# Altium PCB pcb.PcbDoc
Units mil, origin at the board's own origin, x right, y up, seen from the top; angles counter-clockwise.
Board outline 2140 x 3285 mil, 2 copper layers (Top Layer, Bottom Layer); 24 components, 73 nets, 179 pads, 210 vias.
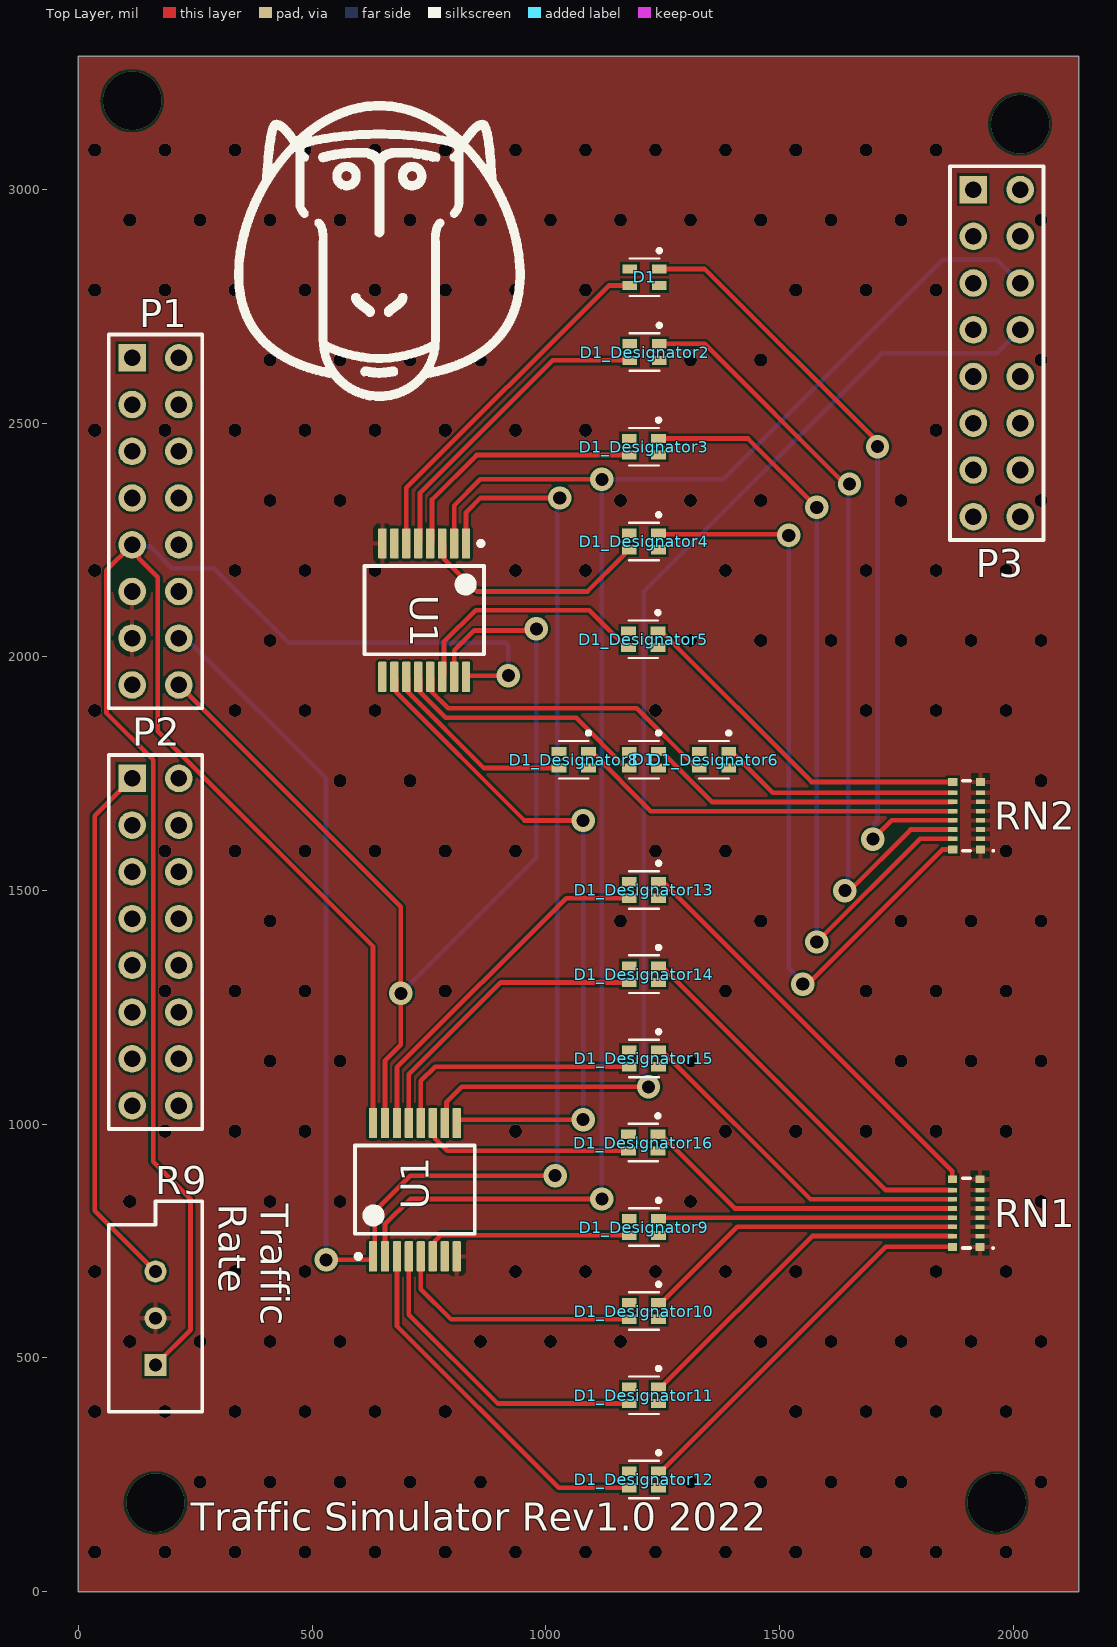
[diagram p0: Top Layer view]
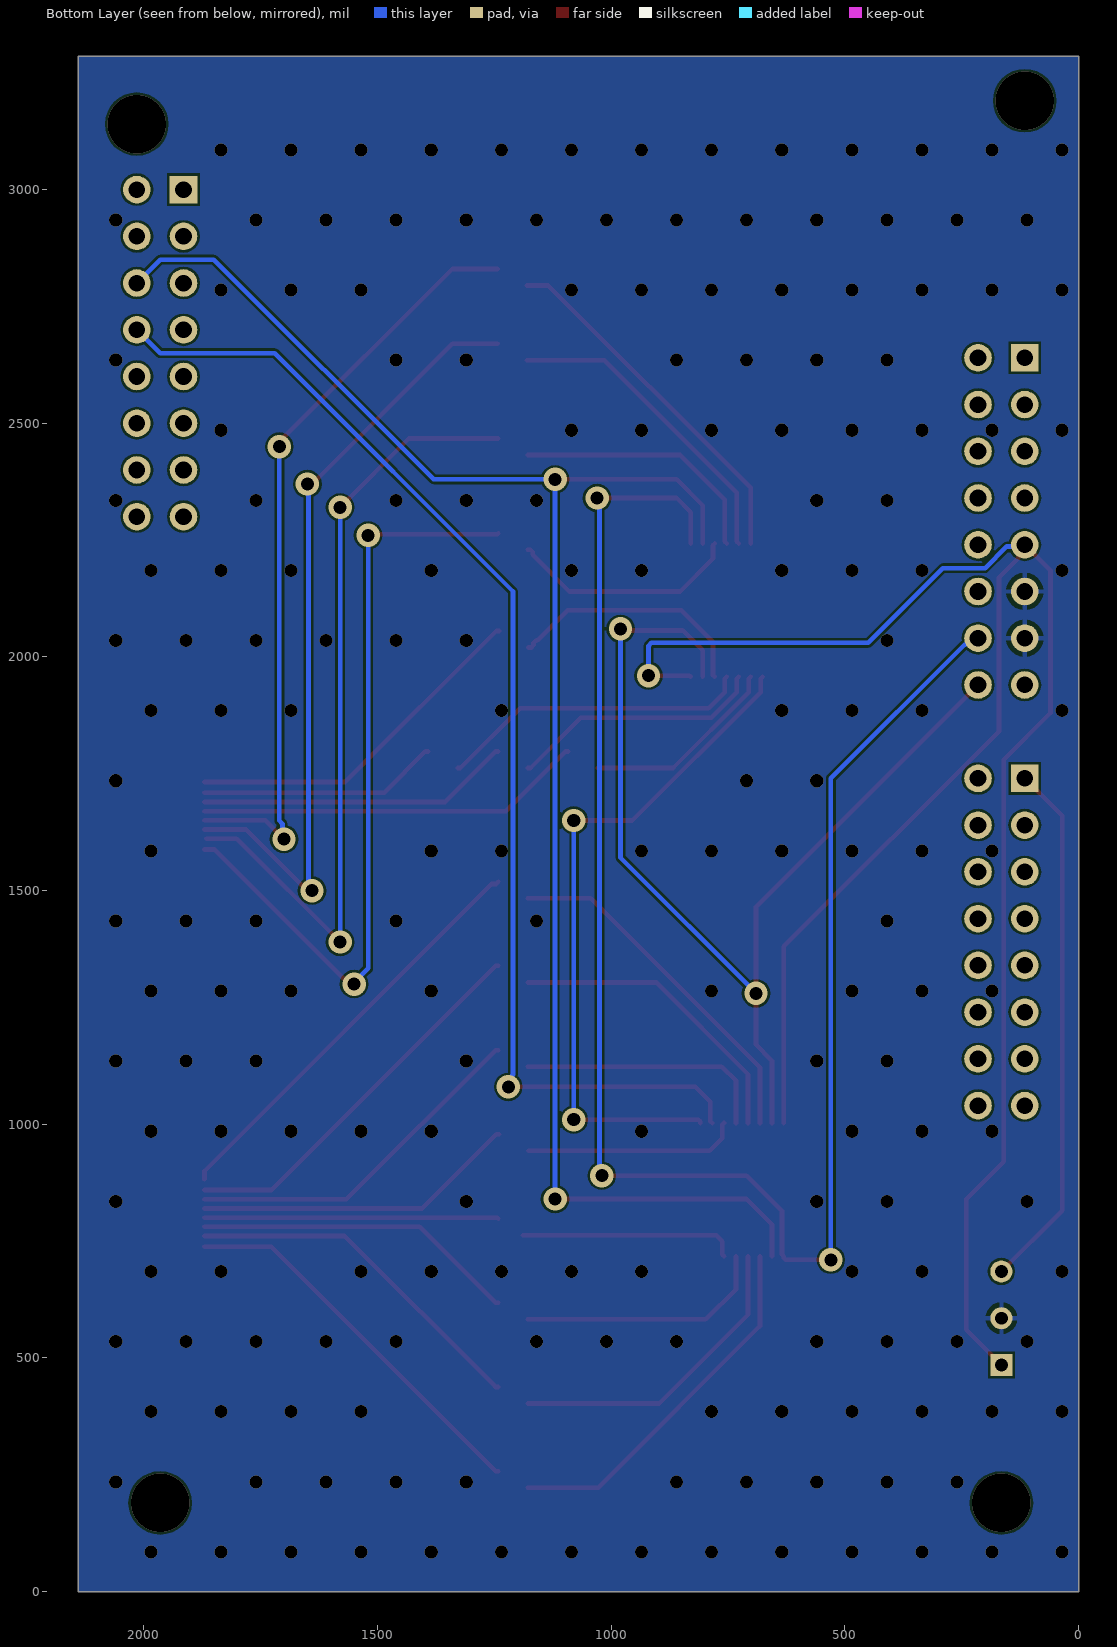
[diagram p1: Bottom Layer view, seen from below]
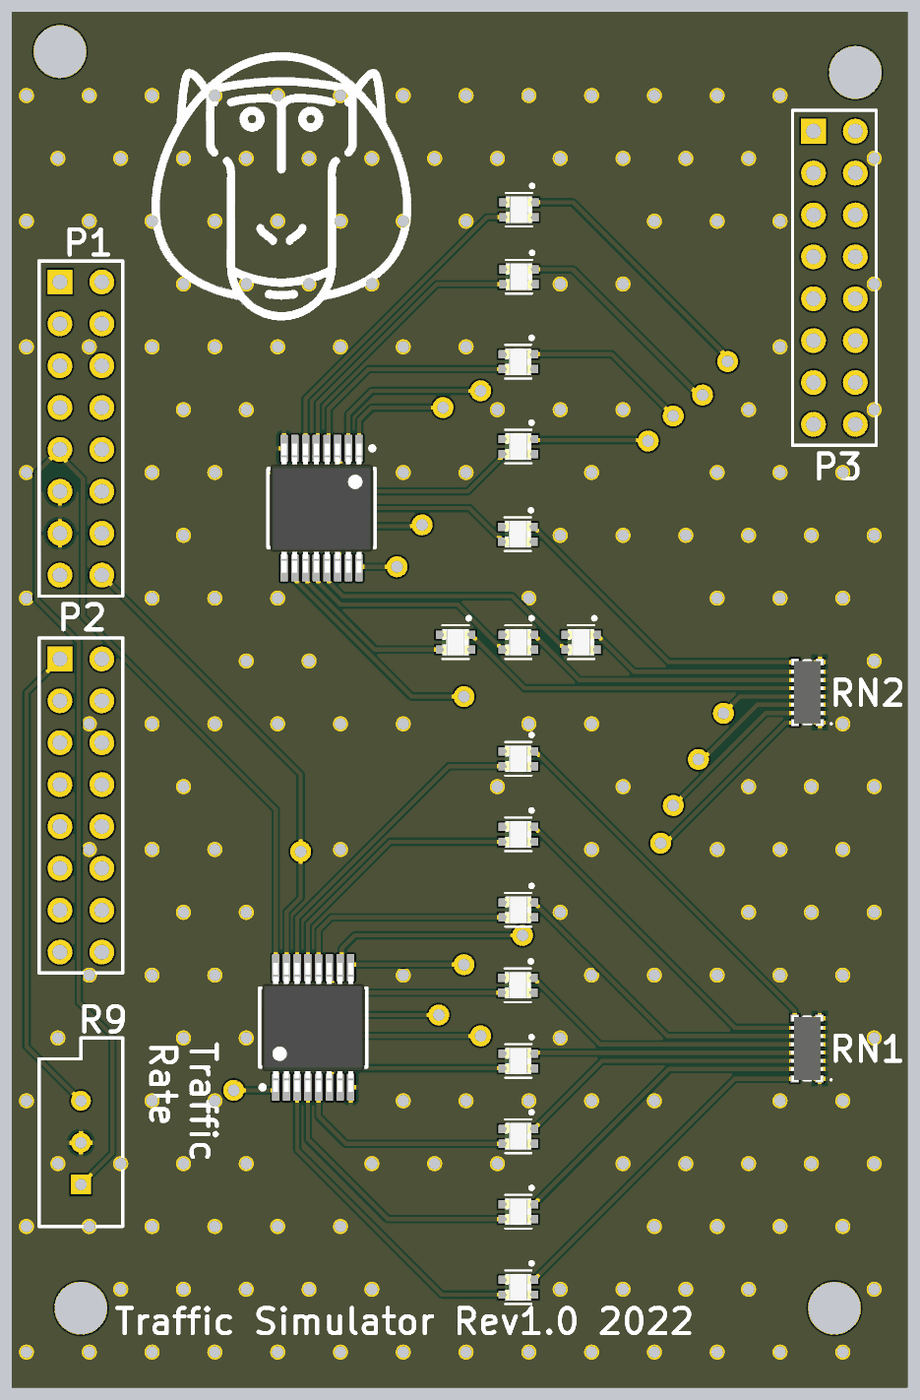
[diagram p2: 3D render of the assembled board from above, using the file's embedded part models]

## Layer stack, top to bottom
Top Solder: solder mask 0.4, Solder Resist, Dk 3.5
Top Layer: signal copper 1.4
Dielectric 1: dielectric 12.6, FR-4, Dk 4.8
Bottom Layer: signal copper 1.4
Bottom Solder: solder mask 0.4, Solder Resist, Dk 3.5

## Board outline
0,0 2140,0 2140,3285 0,3285

## Design rules (kind name [scope] priority, off if disabled: settings)
Clearance [All] p1: gap=5 ignorepadtopadclearanceinfootprint=TRUE except(0: Arc-Hole Track-Hole SMDPad-Hole THPad-Hole Via-Hole Fill-Hole Poly-Hole Region-Hole Text-Hole)
PolygonConnect [All] p1: connectstyle=Relief reliefconductorwidth=10 reliefentries=4 polygonreliefangle="90 Angle" airgapwidth=10
RoutingVias [All] p1: holewidth=28 width=50 viastyle="Through Hole" minholewidth=28 minwidth=50 maxholewidth=28 maxwidth=50
ShortCircuit [All] p1: allowed=TRUE
SolderMaskExpansion [All] p1: expansion=4 istentingtop=FALSE
UnRoutedNet [All] p1: checkbadconnections=TRUE
Width [All] p1: maxlimit=10 minlimit=5 preferedwidth=10
28 further rules are at their usual default settings.

## Classes and differential pairs
channel class LED: Designator1 Designator2 Designator3 Designator4 Designator5 Designator6 Designator7 Designator8 Designator9 Designator10 Designator11 Designator12 Designator13 Designator14 Designator15 Designator16
component class Designator16: D1_Designator16
component class Designator15: D1_Designator15
component class Designator14: D1_Designator14
component class Designator13: D1_Designator13
component class Designator12: D1_Designator12
component class Designator11: D1_Designator11
component class Designator10: D1_Designator10
component class Designator9: D1_Designator9
component class Designator8: D1_Designator8
component class Designator6: D1_Designator6
component class Designator5: D1_Designator5
component class Designator4: D1_Designator4
channel class driver: Designator1 Designator2 Designator3
component class Top: P1 P2 P3 R9
component class Designator3: D1_Designator3
component class Designator2: D1_Designator2
component class Designator1: D1

## Components (designator, comment, footprint, x,y, rotation, side; value= is the part's Value field where it differs from the comment)
D1 "B38G3RGB-10D0003H2U1930" LED_B38G3RGB-10D0003H2U1930 1210,1780 r270 top
D1 "B38G3RGB-10D0003H2U1930" LED_B38G3RGB-10D0003H2U1930 1211.5,2812.28 r270 top
D1_Designator2 "B38G3RGB-10D0003H2U1930" LED_B38G3RGB-10D0003H2U1930 1211.5,2652.28 r270 top (schematic designator D1)
D1_Designator3 "B38G3RGB-10D0003H2U1930" LED_B38G3RGB-10D0003H2U1930 1210,2449.65 r270 top (schematic designator D1)
D1_Designator4 "B38G3RGB-10D0003H2U1930" LED_B38G3RGB-10D0003H2U1930 1210,2247.02 r270 top (schematic designator D1)
D1_Designator5 "B38G3RGB-10D0003H2U1930" LED_B38G3RGB-10D0003H2U1930 1208.5,2037.72 r270 top (schematic designator D1)
D1_Designator6 "B38G3RGB-10D0003H2U1930" LED_B38G3RGB-10D0003H2U1930 1360,1780 r270 top (schematic designator D1)
D1_Designator8 "B38G3RGB-10D0003H2U1930" LED_B38G3RGB-10D0003H2U1930 1060,1780 r270 top (schematic designator D1)
D1_Designator9 "B38G3RGB-10D0003H2U1930" LED_B38G3RGB-10D0003H2U1930 1210,780 r270 top (schematic designator D1)
D1_Designator10 "B38G3RGB-10D0003H2U1930" LED_B38G3RGB-10D0003H2U1930 1210,600.4 r270 top (schematic designator D1)
D1_Designator11 "B38G3RGB-10D0003H2U1930" LED_B38G3RGB-10D0003H2U1930 1210,420.2 r270 top (schematic designator D1)
D1_Designator12 "B38G3RGB-10D0003H2U1930" LED_B38G3RGB-10D0003H2U1930 1210,240 r270 top (schematic designator D1)
D1_Designator13 "B38G3RGB-10D0003H2U1930" LED_B38G3RGB-10D0003H2U1930 1210,1501.39 r270 top (schematic designator D1)
D1_Designator14 "B38G3RGB-10D0003H2U1930" LED_B38G3RGB-10D0003H2U1930 1210,1321.19 r270 top (schematic designator D1)
D1_Designator15 "B38G3RGB-10D0003H2U1930" LED_B38G3RGB-10D0003H2U1930 1210,1140.99 r270 top (schematic designator D1)
D1_Designator16 "B38G3RGB-10D0003H2U1930" LED_B38G3RGB-10D0003H2U1930 1208.5,960.79 r270 top (schematic designator D1)
P1 "Header 8X2" HDR2X8 115,2640 r270 top
P2 "Header 8X2" HDR2X8 115,1740 r270 top
P3 "Header 8X2" HDR2X8 1915,3000 r270 top
R9 "RPot" VR5 165,585 r90 top value=10k
RN1 "EXB-2HV681JV" EXB2HV680JV 1900,810 r90 top (schematic designator RN?)
RN2 "EXB-2HV681JV" EXB2HV680JV 1900.47,1660.16 r90 top (schematic designator RN?)
U1 "SN74HC165DBR" DB0016A_N 720,860 r90 top
U1 "SN74HC165DBR" DB0016A_N 740,2100 r270 top

## Footprints (in the part's own frame and the unit in brackets; to place one, negate y for a bottom-side part, rotate by r counter-clockwise, add the part's x,y. Pads: shape width x height; smd on the part's side, far side on the other; paste and mask are expansions set on the pad)
DB0016A_N [mm] "SOP, 16-Leads, Body 5.6x6.5mm, Pitch 0.65mm, IPC Medium Density"
  rrect22% 1.65x0.45 smd: 1(-3.625,2.275) 2(-3.625,1.625) 3(-3.625,0.975) 4(-3.625,0.325) 5(-3.625,-0.325) 6(-3.625,-0.975) 7(-3.625,-1.625) 8(-3.625,-2.275) 9(3.625,-2.275) 10(3.625,-1.625) 11(3.625,-0.975) 12(3.625,-0.325) 13(3.625,0.325) 14(3.625,0.975) 15(3.625,1.625) 16(3.625,2.275)
  silkscreen extent -3.75,-3.25 2.4,3.25, body extent -3.91,-3.1 3.91,3.1, height 2
EXB2HV680JV [mm]
  rect 0.425x0.5 smd: 1(-1.838,-0.75) 8(1.838,-0.75) 9(1.838,0.75) 16(-1.838,0.75)
  rect 0.25x0.5 smd: 2(-1.25,-0.75) 3(-0.75,-0.75) 4(-0.25,-0.75) 5(0.25,-0.75) 6(0.75,-0.75) 7(1.25,-0.75) 10(1.25,0.75) 11(0.75,0.75) 12(0.25,0.75) 13(-0.25,0.75) 14(-0.75,0.75) 15(-1.25,0.75)
  silkscreen extent -1.95,-1.5 1.9,0.2, body extent -2.01,-0.97 2.01,0.97, height 0.65
HDR2X8 [mm] "Connector; Header; 8x2 Position"
  rect 1.5x1.5 hole 0.9: 1(0,0)
  round 1.5 hole 0.9: 2(0,2.54) 3(2.54,0) 4(2.54,2.54) 5(5.08,0) 6(5.08,2.54) 7(7.62,0) 8(7.62,2.54) 9(10.16,0) 10(10.16,2.54) 11(12.7,0) 12(12.7,2.54) 13(15.24,0) 14(15.24,2.54) 15(17.78,0) 16(17.78,2.54)
  silkscreen extent -1.27,-1.27 19.05,3.81
LED_B38G3RGB-10D0003H2U1930 [mm]
  rect 0.5x0.8 smd: 1(-0.45,0.8) 2(0.45,0.8) 3(0.45,-0.8) 4(-0.45,-0.8)
  silkscreen extent -1.55,-0.8 1.02,0.9, body extent -0.8,-0.8 0.8,0.8, height 0.4
VR5 [mm] "Thru-Hole; 3 Leads"
  rect 1.2x1.2 hole 0.7: 1(-2.54,0)
  round 1.2 hole 0.7: 2(0,0) 3(2.54,0)
  silkscreen extent -5.08,-2.54 6.35,2.54

## Part data
D1 D1 D1_Designator2 D1_Designator3 D1_Designator4 D1_Designator5 D1_Designator6 D1_Designator8 D1_Designator9 D1_Designator10 D1_Designator11 D1_Designator12 D1_Designator13 D1_Designator14 D1_Designator15 D1_Designator16: "Red, Green, Blue (RGB) - LED Indication - Discrete 2V Red, 3V Green, 3V Blue 0606 (1616 Metric)", Package=None, Availability="In Stock", Check_prices=https://www.snapeda.com/parts/B38G3RGB-10D0003H2U1930/Harvatek/view-part/?ref=eda, MF="Harvatek Corporation", MP=B38G3RGB-10D0003H2U1930, Price=None, Purchase-URL=https://pricing.snapeda.com/search/part/B38G3RGB-10D0003H2U1930/?ref=eda, SnapEDA_Link=https://www.snapeda.com/parts/B38G3RGB-10D0003H2U1930/Harvatek/view-part/?ref=snap
P1 P2 P3: "Header, 8-Pin, Dual row", Supplier Part Number 1=S7076-ND, LatestRevisionDate=17-Jul-2002, LatestRevisionNote="Re-released for DXP Platform.", Publisher="Altium Limited", Supplier 1=Digi-Key
R9: "Potentiometer", Supplier Part Number 1=987-1760-ND, LatestRevisionDate=17-Jul-2002, LatestRevisionNote="Re-released for DXP Platform.", PackageDescription="Variable Resistor, Thru-Hole; 3 Leads", PackageReference=VR5, Published=8-Jun-2000, Publisher="Altium Limited", Set Position=0.5, Sim Note="Enter the Resistance value and the set point into parameter fields.", Supplier 1=Digi-Key
RN1 RN2: "Resistor Network", Manufacturer_Name=Panasonic, Mouser Part Number=667-EXB-2HV681JV, Arrow Part Number=EXB-2HV681JV, Arrow Price/Stock=https://www.arrow.com/en/products/exb-2hv681jv/panasonic, Datasheet Link=https://industrial.panasonic.com/cdbs/www-data/pdf/AOC0000/AOC0000COL4.pdf, Height=0.55mm, Manufacturer_Part_Number=EXB-2HV681JV, Mouser Price/Stock=https://www.mouser.co.uk/ProductDetail/Panasonic/EXB-2HV681JV?qs=oE3VwAv%2FYtkCvpXzHWFIiQ%3D%3D
U1 U1: library part CMP-0780-00071-3, "8-Bit Parallel-Load Shift Registers, DB0016A, LARGE T&R", F @ Nom Voltage(Max)(Mhz)=28, Generic Part Number=SN74HC165, ICC @ Nom Voltage(Max)(mA)=0.08, Manufacturer="Texas Instruments", Operating Temperature Range(C)="-40 to 125", Rating=Catalog, tpd @ Nom Voltage(Max)(ns)=38, Voltage(Nom)(V)=6, 3-State Output=No, Bits=8, Code_JEDEC=MO-150, DatasheetVersion=SCLS116G, Input Type=CMOS, Output Drive (IOL/IOH)(Max)(mA)=5.2/-5.2, Output Type=CMOS, PackageReference=DB0016A, PackageVersion=http://www.ti.com/lit/ml/mpds507/mpds507.pdf, Technology Family=HC, VCC(Max)(V)=6, VCC(Min)(V)=2

## Via types
v1: diameter 28, hole 28, Top Layer to Bottom Layer, 187 vias
v2: diameter 50, hole 28, Top Layer to Bottom Layer, 19 vias
v3: diameter 125, hole 125, Top Layer to Bottom Layer, 4 vias

## Nets (pads, with @x,y where several pads share a name; then routed paths per layer and width w, separated by ;. In a path a pad name is that pad's centre, name@x,y a point inside that pad or via, vN(x,y) a via of type N, cw(c..) or ccw(c..) an arc to the next point about the centre after c; other vN are vias at no path point)
En': P1.16 U1.15 | length 2300
  Top Layer w10: P1.16 690,1465 v2(690,1280) 690,1170 656.02,1136.02 U1.15@656.02,1002.72 ; U1.15@803.98,1957.28 803.98,2013.98 846.72,2056.72 976.72,2056.72 v2(980,2060)
  Bottom Layer w10: v2(690,1280) 980,1570 v2(980,2060)
GND: P1.11 P1.13 R9.2 RN1.1 RN1.2 RN1.3 RN1.4 RN1.5 RN1.6 RN1.7 RN1.8 RN2.1 RN2.2 RN2.3 RN2.4 RN2.5 RN2.6 RN2.7 RN2.8 U1.8
  other v1: 35,85 185,85 335,85 485,85 635,85 785,85 935,85 1085,85 1235,85 1385,85 1535,85 1685,85 1835,85 1985,85 260,235 410,235 560,235 710,235 860,235 1310,235 1460,235 1610,235 1760,235 2060,235 35,385 185,385 335,385 485,385 635,385 785,385 1535,385 1685,385 1835,385 1985,385 110,535 260,535 410,535 560,535 860,535 1010,535 1160,535 1460,535 1610,535 1760,535 1910,535 2060,535 35,685 335,685 485,685 935,685 1085,685 1235,685 1385,685 1535,685 1835,685 1985,685 110,835 410,835 560,835 1310,835 2060,835 185,985 335,985 485,985 935,985 1385,985 1535,985 1685,985 1835,985 1985,985 410,1135 560,1135 1310,1135 1760,1135 1910,1135 2060,1135 185,1285 335,1285 485,1285 785,1285 1385,1285 1685,1285 1835,1285 1985,1285 410,1435 1160,1435 1460,1435 1760,1435 1910,1435 2060,1435 185,1585 335,1585 485,1585 635,1585 785,1585 935,1585 1235,1585 1385,1585 1985,1585 560,1735 710,1735 2060,1735 35,1885 335,1885 485,1885 635,1885 1235,1885 1685,1885 1835,1885 1985,1885 410,2035 1310,2035 1460,2035 1610,2035 1760,2035 1910,2035 2060,2035 35,2185 335,2185 485,2185 635,2185 935,2185 1085,2185 1385,2185 1685,2185 1835,2185 1985,2185 410,2335 560,2335 1160,2335 1310,2335 1460,2335 1760,2335 2060,2335 35,2485 185,2485 335,2485 485,2485 635,2485 785,2485 935,2485 1085,2485 1835,2485 410,2635 560,2635 710,2635 860,2635 1310,2635 1460,2635 2060,2635 35,2785 185,2785 335,2785 485,2785 635,2785 785,2785 935,2785 1085,2785 1535,2785 1685,2785 1835,2785 110,2935 260,2935 410,2935 560,2935 710,2935 860,2935 1010,2935 1160,2935 1310,2935 1460,2935 1610,2935 1760,2935 2060,2935 35,3085 185,3085 335,3085 485,3085 635,3085 785,3085 935,3085 1085,3085 1235,3085 1385,3085 1535,3085 1685,3085 1835,3085
LEDS1_Designator1: D1_Designator8.3 U1.11@701.61,1957.28 | length 424.6
  Top Layer w10: U1.11@701.61,1957.28 705.47,1953.43 705.47,1924.53 867.72,1762.28 D1_Designator8.3
LEDS1_Designator2: D1_Designator16.3 U1.11@758.39,1002.72 | length 460.2
  Top Layer w10: U1.11@758.39,1002.72 762.24,998.86 762.24,970.11 789.27,943.08 D1_Designator16.3
LEDS2_Designator1: D1.3@1178.5,1762.28 U1.12@727.2,1957.28 | length 548.9
  Top Layer w10: U1.12@727.2,1957.28 731.06,1953.43 731.06,1924.68 785.74,1870 1064.88,1870 1172.6,1762.28 D1.3@1178.5,1762.28
LEDS2_Designator2: D1_Designator15.3 U1.12@732.8,1002.72 | length 548.4
  Top Layer w10: U1.12@732.8,1002.72 732.8,1092.8 763.28,1123.28 D1_Designator15.3
LEDS3_Designator1: D1_Designator6.3 U1.13@752.8,1957.28 | length 673.3
  Top Layer w10: U1.13@752.8,1957.28 756.65,1953.43 756.65,1924.68 791.33,1890 1194.88,1890 1322.6,1762.28 D1_Designator6.3
LEDS3_Designator2: D1_Designator14.3 U1.13@707.2,1002.72 | length 657.1
  Top Layer w10: U1.13@707.2,1002.72 707.2,1107.2 903.48,1303.48 D1_Designator14.3
LEDS4_Designator1: D1_Designator5.3 U1.14@778.39,1957.28 | length 535.4
  Top Layer w10: U1.14@778.39,1957.28 782.24,1961.14 782.24,2032.24 850,2100 1092.71,2100 1157.12,2035.59 1160.4,2035.59 1166.26,2029.73 1166.26,2024.84 1171.1,2020 D1_Designator5.3
LEDS4_Designator2: D1_Designator13.3 U1.14@681.61,1002.72 | length 765.8
  Top Layer w10: U1.14@681.61,1002.72 681.61,1121.61 1043.67,1483.67 D1_Designator13.3
LEDS5_Designator1: D1_Designator4.3 U1.3@778.39,2242.72 | length 500
  Top Layer w10: U1.3@778.39,2242.72 782.24,2238.86 782.24,2210.11 852.35,2140 1089.2,2140 1167.76,2218.56 1167.76,2224.46 1172.6,2229.3 D1_Designator4.3
LEDS5_Designator2: D1_Designator12.3 U1.3@681.61,717.28 | length 789.1
  Top Layer w10: U1.3@681.61,717.28 681.61,568.39 1027.72,222.28 D1_Designator12.3
LEDS6_Designator1: D1_Designator3.3 U1.4@752.8,2242.72 | length 556.9
  Top Layer w10: U1.4@752.8,2242.72 756.65,2246.57 756.65,2336.65 851.93,2431.93 D1_Designator3.3
LEDS6_Designator2: D1_Designator11.3 U1.4@707.2,717.28 | length 674.6
  Top Layer w10: U1.4@707.2,717.28 707.2,592.8 897.52,402.48 D1_Designator11.3
LEDS7_Designator1: D1_Designator2.3 U1.5@727.2,2242.72 | length 676.3
  Top Layer w10: U1.5@727.2,2242.72 731.06,2246.57 731.06,2351.06 1014.57,2634.57 D1_Designator2.3
LEDS7_Designator2: D1_Designator10.3 U1.5@732.8,717.28 | length 542.5
  Top Layer w10: U1.5@732.8,717.28 732.8,647.2 797.32,582.68 D1_Designator10.3
LEDS8_Designator1: D1.3@1180,2794.57 U1.6@701.61,2242.72 | length 776.6
  Top Layer w10: U1.6@701.61,2242.72 701.61,2361.61 1134.57,2794.57 D1.3@1180,2794.57
LEDS8_Designator2: D1_Designator9.3 U1.6@758.39,717.28 | length 465.8
  Top Layer w10: U1.6@758.39,717.28 762.24,721.14 762.24,749.89 775.23,762.88 D1_Designator9.3@1188.5,762.88
NetD1_Designator1_1: D1.1@1242.99,2830 RN2.13 | length 1662.1
  Top Layer w10: D1.1@1242.99,2830 1340,2830 1710,2460 v2(1710,2450) ; v2(1700,1610) 1740.32,1650.32 RN2.13
  Bottom Layer w10: v2(1700,1610) 1703.28,1613.28 1703.28,1643.28 1710,1650 v2(1710,2450)
NetD1_Designator1_2: D1.2@1242.99,2794.57
NetD1_Designator1_4: D1.4@1180,2830
NetD1_Designator2_1: D1_Designator2.1 RN2.14 | length 1690.5
  Top Layer w10: D1_Designator2.1 1340,2670 1640,2370 v2(1650,2370) ; v2(1640,1500) 1650,1500 1780.63,1630.63 RN2.14
  Bottom Layer w10: v2(1640,1500) 1647.63,1507.63 1647.63,2367.63 v2(1650,2370)
NetD1_Designator2_2: D1_Designator2.2
NetD1_Designator2_4: D1_Designator2.4
NetD1_Designator3_1: D1_Designator3.1 RN2.15 | length 1707.2
  Top Layer w10: D1_Designator3.1 1432.63,2467.37 v2(1580,2320) ; v2(1580,1390) 1800.95,1610.95 RN2.15@1866.1,1610.95
  Bottom Layer w10: v2(1580,1390) v2(1580,2320)
NetD1_Designator3_2: D1_Designator3.2
NetD1_Designator3_4: D1_Designator3.4
NetD1_Designator4_1: D1_Designator4.1 RN2.16 | length 1693
  Top Layer w10: D1_Designator4.1 1243.86,2262.37 1517.63,2262.37 v2(1520,2260) ; v2(1550,1300) 1560.82,1300 1848.62,1587.8 RN2.16
  Bottom Layer w10: v2(1520,2260) 1520,1333.64 1550,1303.64 v2(1550,1300)
NetD1_Designator4_2: D1_Designator4.2
NetD1_Designator4_4: D1_Designator4.4
NetD1_Designator5_1: D1_Designator5.1 RN2.9 | length 764.7
  Top Layer w10: D1_Designator5.1 1245.91,2055.43 1568.82,1732.52 RN2.9
NetD1_Designator5_2: D1_Designator5.2
NetD1_Designator5_4: D1_Designator5.4
NetD1_Designator6_1: D1_Designator6.1 RN2.10 | length 516
  Top Layer w10: D1_Designator6.1 1397.4,1797.72 1485.75,1709.37 RN2.10
NetD1_Designator6_2: D1_Designator6.2
NetD1_Designator6_4: D1_Designator6.4
NetD1_Designator7_1: D1.1@1241.5,1797.72 RN2.11 | length 674.2
  Top Layer w10: D1.1@1241.5,1797.72 1247.4,1797.72 1355.43,1689.69 RN2.11
NetD1_Designator7_2: D1.2@1241.5,1762.28
NetD1_Designator7_4: D1.4@1178.5,1797.72
NetD1_Designator8_1: D1_Designator8.1 RN2.12 | length 832.3
  Top Layer w10: D1_Designator8.1 1097.4,1797.72 1225.12,1670 RN2.12
NetD1_Designator8_2: D1_Designator8.2
NetD1_Designator8_4: D1_Designator8.4
NetD1_Designator9_1: D1_Designator9.1 RN1.13 | length 630
  Top Layer w10: D1_Designator9.1 1243.86,800.08 1870.39,800.08 RN1.13
NetD1_Designator9_2: D1_Designator9.2
NetD1_Designator9_4: D1_Designator9.4
NetD1_Designator10_1: D1_Designator10.1 RN1.14 | length 696.2
  Top Layer w10: D1_Designator10.1 1247.4,618.11 1409.76,780.47 RN1.14
NetD1_Designator10_2: D1_Designator10.2
NetD1_Designator10_4: D1_Designator10.4
NetD1_Designator11_1: D1_Designator11.1 RN1.15 | length 762.7
  Top Layer w10: D1_Designator11.1 1247.4,437.92 1570.27,760.79 RN1.15
NetD1_Designator11_2: D1_Designator11.2
NetD1_Designator11_4: D1_Designator11.4
NetD1_Designator12_1: D1_Designator12.1 RN1.16 | length 827.8
  Top Layer w10: D1_Designator12.1 1247.4,257.72 1727.32,737.64 RN1.16
NetD1_Designator12_2: D1_Designator12.2
NetD1_Designator12_4: D1_Designator12.4
NetD1_Designator13_1: D1_Designator13.1 RN1.9 | length 902.8
  Top Layer w10: D1_Designator13.1 1246.34,1514.27 1255.73,1514.27 1270,1500 1870.13,899.87 1870.13,882.7 RN1.9
NetD1_Designator13_2: D1_Designator13.2
NetD1_Designator13_4: D1_Designator13.4
NetD1_Designator14_1: D1_Designator14.1 RN1.10 | length 827.7
  Top Layer w10: D1_Designator14.1 1247.4,1338.91 1727.1,859.21 RN1.10
NetD1_Designator14_2: D1_Designator14.2
NetD1_Designator14_4: D1_Designator14.4
NetD1_Designator15_1: D1_Designator15.1 RN1.11 | length 761.2
  Top Layer w10: D1_Designator15.1 1247.4,1158.71 1566.58,839.53 RN1.11
NetD1_Designator15_2: D1_Designator15.2
NetD1_Designator15_4: D1_Designator15.4
NetD1_Designator16_1: D1_Designator16.1 RN1.12 | length 696.2
  Top Layer w10: D1_Designator16.1 1245.91,978.51 1404.58,819.84 RN1.12
NetD1_Designator16_2: D1_Designator16.2
NetD1_Designator16_4: D1_Designator16.4
NetU1_Designator1_9: U1.9@650.43,1957.28
NetU1_Designator2_9: U1.9@809.57,1002.72 U1.10@676.02,1957.28 | length 1463.6
  Top Layer w10: U1.10@676.02,1957.28 679.88,1953.43 679.88,1924.68 954.56,1650 v2(1080,1650) ; U1.9@809.57,1002.72 809.57,1006.14 813.43,1010 v2(1080,1010)
  Bottom Layer w10: v2(1080,1010) v2(1080,1650)
POT: P2.1 R9.3 | length 1144.6
  Top Layer w10: P2.1 35,1660 35,815 R9.3@166.88,683.13
"Ser Clock": P3.6 U1.2 | length 3626
  Top Layer w10: U1.2@656.02,717.28 656.02,786.02 710,840 v2(1120,840) ; U1.2@803.98,2242.72 803.98,2323.98 860,2380 v2(1120,2380)
  Bottom Layer w10: v2(1120,840) v2(1120,2380) 1380,2380 1850,2850 1965,2850 P3.6
"Ser Output": P3.8 U1.10@783.98,1002.72 | length 2593.3
  Top Layer w10: U1.10@783.98,1002.72 787.83,1006.57 787.83,1047.83 820,1080 v2(1220,1080)
  Bottom Layer w10: v2(1220,1080) 1212.35,1087.65 1212.35,1103.51 1210,1105.86 1210,2140 1720,2650 1965,2650 P3.8
Shft/Ld': P1.14 U1.1 | length 3824.4
  Top Layer w10: v2(530,710) 626.58,710 630.43,713.86 630.43,717.28 634.29,721.14 634.29,814.29 710,890 v2(1020,890) ; U1.1@829.57,2242.72 829.57,2309.57 860,2340 v2(1030,2340)
  Bottom Layer w10: P1.14 228.27,2040 242.26,2026.01 243.99,2026.01 530,1740 v2(530,710) ; v2(1020,890) 1025,895 1025,2335 v2(1030,2340)
VCC: P1.9 R9.1 U1.16 | length 4384.3
  Top Layer w10: R9.1 240,560 240,840 160,920 160,1780 60,1880 60,2185 P1.9 115,2226.73 128.99,2212.74 128.99,2211.01 170,2170 170,1840.9 630.43,1380.47 U1.16@630.43,1002.72 ; U1.16@829.57,1957.28 832.28,1960 v2(920,1960)
  Bottom Layer w10: P1.9 118.67,2236.33 153.67,2236.33 200,2190 290,2190 450,2030 914.14,2030 920,2024.14 v2(920,1960)
pads on no net: P1.1 P1.2 P1.3 P1.4 P1.5 P1.6 P1.7 P1.8 P1.10 P1.12 P1.15 P2.2 P2.3 P2.4 P2.5 P2.6 P2.7 P2.8 P2.9 P2.10 P2.11 P2.12 P2.13 P2.14 P2.15 P2.16 P3.1 P3.2 P3.3 P3.4 P3.5 P3.7 P3.9 P3.10 P3.11 P3.12 P3.13 P3.14 P3.15 P3.16 U1.7
copper on no net:
  other v3: 165,190 1965,190 2015,3140 115,3190

## Polygon pours and split planes (outlines as drawn)
GND on Bottom Layer "GND_L02_P001" (solid, pour order 1): 0,0 2140,0 2140,3285 0,3285
GND on Top Layer "PWR" (solid, pour order 0): 0,0 2140,0 2140,3285 0,3285

## Silkscreen, mask and mechanical layers (free items; w line width, h text height)
Top Overlay:
  drawing of 7 lines, arcs and shapes, not listed
  text "Traffic / Rate" at 300,830 h60 r270
  text "Traffic Simulator Rev1.0 2022" at 240,130 h60